# EAGLE board Stunning Bruticus-Luulia (EAGLE 9.7.0)

Size 113.17 x 87.16 mm. Coordinates in mm from the lower left corner, seen from the top.
Outline: 0,0 113.17,0 113.17,87.16 0,87.16 0,0
Copper layers (1*16): Top 0.035mm / dielectric 1.5mm / Bottom 0.035mm
Design rules "default": minimum track width 6mil, minimum drill 0.35mm, track to track 6mil, track to pad 6mil, pad to pad 6mil, via to via 6mil, smd to smd 6mil, copper to edge 40mil, drill to drill 6mil, minimum pad ring 10mil, minimum via ring 8mil, stop-mask expansion 4mil, vias tented up to drill 0mil, thermal gap 10mil

## Footprints (pad centres in the part's own frame; a part is rotated, then mirrored left to right if it is on the bottom)
LEDRD254W60D565H860B_Y = drill 0.981 pad 1.581: 1 -1.27,0; 2 1.27,0
LEDRD254W60D565H860B_G = drill 0.981 pad 1.581: 1 -1.27,0; 2 1.27,0
LEDRD254W60D565H860B = drill 0.981 pad 1.581: 1 -1.27,0; 2 1.27,0
RESAD1016W63L850D250B = drill 0.83 pad 1.43: 1 -5.08,0; 2 5.08,0
ARDUINO-UNO-R3-SHIELD = drill 1.016 pad 1.88: 3.3V 24.13,-2.54; 5V 24.13,0; A0 24.13,12.7; A1 24.13,15.24; A2 24.13,17.78; A3 24.13,20.32; A4 24.13,22.86; A5 24.13,25.4; AREF -24.13,-13.97; D2 -24.13,20.32; D3 -24.13,17.78; D4 -24.13,15.24; D5 -24.13,12.7; D6 -24.13,10.16; D7 -24.13,7.62; D8 -24.13,3.81; D9 -24.13,1.27; D10 -24.13,-1.27; D11 -24.13,-3.81; D12 -24.13,-6.35; D13 -24.13,-8.89; GND@0 24.13,2.54; GND@1 24.13,5.08; GND@2 -24.13,-11.43; IOREF 24.13,-7.62; NC 24.13,-10.16; RES 24.13,-5.08; RX -24.13,25.4; SCL -24.13,-19.05; SDA -24.13,-16.51; TX -24.13,22.86; VIN 24.13,7.62

## Placement (x,y rotation side)
DLDAM  YELLOW  [LEDRD254W60D565H860B_Y]  62.56,78.72 180 top
DLDAM2  YELLOW  [LEDRD254W60D565H860B_Y]  97.93,78.39 180 top
DLDVD  GREEN  [LEDRD254W60D565H860B_G]  71.68,79.25 180 top
DLDVD2  GREEN  [LEDRD254W60D565H860B_G]  105.75,78.39 180 top
DLDVM  RED  [LEDRD254W60D565H860B]  54.9,78.05 180 top
DLDVM2  RED  [LEDRD254W60D565H860B]  90.33,78.82 180 top
R1  220  [RESAD1016W63L850D250B]  90.11,67.74 90 top
R2  220  [RESAD1016W63L850D250B]  99.23,68.39 90 top
R3  220  [RESAD1016W63L850D250B]  106.84,68.61 90 top
RRS1  220  [RESAD1016W63L850D250B]  56.17,67.89 90 top
RRS2  220  [RESAD1016W63L850D250B]  63.18,69.48 90 top
RRS3  220  [RESAD1016W63L850D250B]  74.69,68.31 90 top
UPISCAR1  ARDUINO-UNO-R3-SHIELD  [ARDUINO-UNO-R3-SHIELD]  47.88,29.84 270 top

## Library data of the parts
DLDAM DLDAM2 = Tinkercad; CATEGORY: Opto-Electronic; SUB-CATEGORY: LED; VALUE: LED_YELLOW
DLDVD DLDVD2 = Tinkercad; CATEGORY: Opto-Electronic; SUB-CATEGORY: LED; VALUE: LED_GREEN
DLDVM DLDVM2 = Tinkercad; CATEGORY: Opto-Electronic; SUB-CATEGORY: LED; VALUE: LED_RED
R1-R3 RRS1-RRS3 UPISCAR1 = Tinkercad

## Nets
DLDAM2_A: DLDAM2.1 R2.2
DLDAM_A: DLDAM.1 RRS2.2
DLDVD2_A: DLDVD2.1 R3.2
DLDVD_A: DLDVD.1 RRS3.2
DLDVM2_A: DLDVM2.1 R1.2
DLDVM_A: DLDVM.1 RRS1.2
UPISCAR1_D2: R3.1 UPISCAR1.D2
UPISCAR1_D4: R2.1 UPISCAR1.D4
UPISCAR1_D6: R1.1 UPISCAR1.D6
UPISCAR1_D8: RRS3.1 UPISCAR1.D8
UPISCAR1_D10: RRS2.1 UPISCAR1.D10
UPISCAR1_D13: RRS1.1 UPISCAR1.D13
UPISCAR1_GND: DLDAM2.2 DLDAM.2 DLDVD2.2 DLDVD.2 DLDVM2.2 DLDVM.2 UPISCAR1.GND@0 UPISCAR1.GND@1 UPISCAR1.GND@2

## Tracks (layer width: path | path; a pad name or v marks a point on that pad's centre or on a via)
DLDAM2_A  (1 unrouted)
DLDAM_A  (1 unrouted)
DLDVD2_A  (1 unrouted)
DLDVD_A  (1 unrouted)
DLDVM2_A  (1 unrouted)
DLDVM_A  (1 unrouted)
UPISCAR1_D2  (1 unrouted)
UPISCAR1_D4  (1 unrouted)
UPISCAR1_D6  (1 unrouted)
UPISCAR1_D8  (1 unrouted)
UPISCAR1_D10  (1 unrouted)
UPISCAR1_D13  (1 unrouted)
UPISCAR1_GND  (8 unrouted)